# Altium PCB DUTBoard_Routed.PcbDoc (part 3 of 3)
Units mil, origin at the board's own origin, x right, y up, seen from the top; angles counter-clockwise.
Board outline 5475 x 5475 mil, 4 copper layers (Top Layer, Mid-Layer 1, Mid-Layer 2, Bottom Layer); 89 components, 471 nets, 1705 pads, 347 vias.
Unrouted connection lines stored in the file: 677.
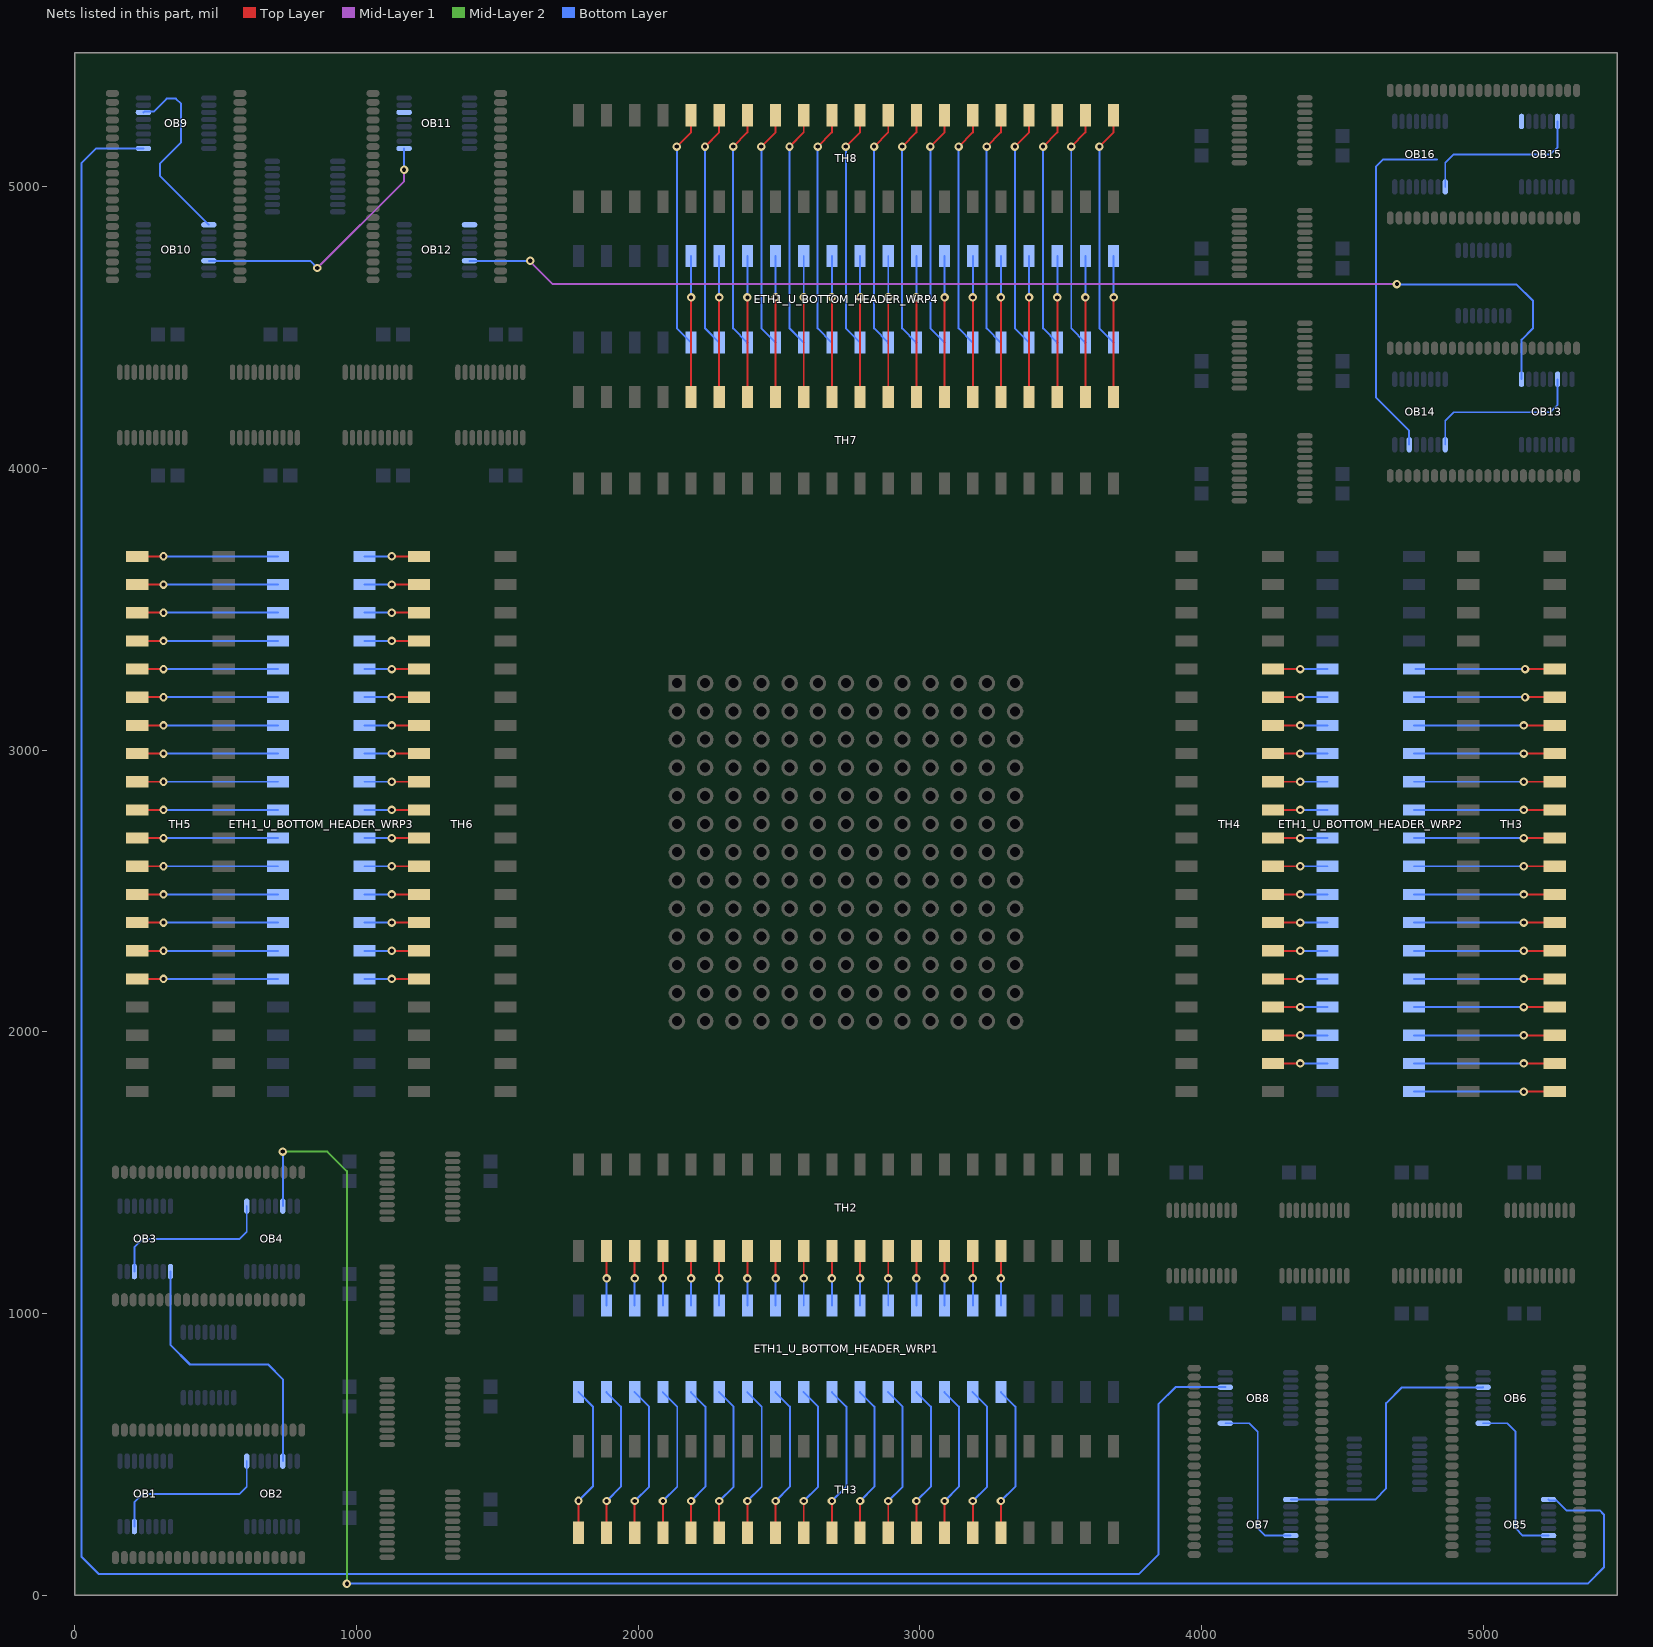
[diagram p5: the nets of this part, all layers, seen from the top]

## Via types
v1: diameter 30, hole 15, Top Layer to Bottom Layer, 347 vias

## Nets (pads, with @x,y where several pads share a name; then routed paths per layer and width w, separated by ;. In a path a pad name is that pad's centre, name@x,y a point inside that pad or via, vN(x,y) a via of type N, cw(c..) or ccw(c..) an arc to the next point about the centre after c; other vN are vias at no path point) (continued)
OUTSIDE_L_W0_U_BOTTOM_HEADER_WRP3: ETH1_U_BOTTOM_HEADER_WRP3.1 TH6.1 | length 193.6
  Top Layer w7: v1@1125,3688 v1(1125.5,3687.5) TH6.1@1221.46,3687.5
  Bottom Layer w7: ETH1_U_BOTTOM_HEADER_WRP3.1@1028.54,3687.5 v1(1125.5,3687.5)
OUTSIDE_L_W0_U_BOTTOM_HEADER_WRP4: ETH1_U_BOTTOM_HEADER_WRP4.1 TH8.1 | length 848.9
  Top Layer w7: v1(3637,5142) 3687.5,5192.5 TH8.1@3687.5,5253.54
  Bottom Layer w7: v1(3637,5142) 3637,4496.96 ETH1_U_BOTTOM_HEADER_WRP4.1@3687.5,4446.46
OUTSIDE_L_W1_U_BOTTOM_HEADER_WRP1: ETH1_U_BOTTOM_HEADER_WRP1.2 TH2.2 | length 192.9
  Top Layer w7: v1(1887.5,1124.5) TH2.2@1887.5,1221.46
  Bottom Layer w7: ETH1_U_BOTTOM_HEADER_WRP1.2@1887.5,1028.54 v1(1887.5,1124.5)
OUTSIDE_L_W1_U_BOTTOM_HEADER_WRP2: ETH1_U_BOTTOM_HEADER_WRP2.2 TH4.2 | length 192.9
  Top Layer w7: TH4.2@4253.54,1887.5 v1(4349.5,1887.5)
  Bottom Layer w7: v1(4349.5,1887.5) ETH1_U_BOTTOM_HEADER_WRP2.2@4446.46,1887.5
OUTSIDE_L_W1_U_BOTTOM_HEADER_WRP3: ETH1_U_BOTTOM_HEADER_WRP3.2 TH6.2 | length 192.9
  Top Layer w7: v1(1125.5,3587.5) TH6.2@1221.46,3587.5
  Bottom Layer w7: ETH1_U_BOTTOM_HEADER_WRP3.2@1028.54,3587.5 v1(1125.5,3587.5)
OUTSIDE_L_W1_U_BOTTOM_HEADER_WRP4: ETH1_U_BOTTOM_HEADER_WRP4.2 TH8.2 | length 848.9
  Top Layer w7: v1(3537,5142) 3587.5,5192.5 TH8.2@3587.5,5253.54
  Bottom Layer w7: v1(3537,5142) 3537,4496.96 ETH1_U_BOTTOM_HEADER_WRP4.2@3587.5,4446.46
OUTSIDE_L_W2_U_BOTTOM_HEADER_WRP1: ETH1_U_BOTTOM_HEADER_WRP1.3 TH2.3 | length 192.9
  Top Layer w7: v1(1987.5,1124.5) TH2.3@1987.5,1221.46
  Bottom Layer w7: ETH1_U_BOTTOM_HEADER_WRP1.3@1987.5,1028.54 v1(1987.5,1124.5)
OUTSIDE_L_W2_U_BOTTOM_HEADER_WRP2: ETH1_U_BOTTOM_HEADER_WRP2.3 TH4.3 | length 192.9
  Top Layer w7: TH4.3@4253.54,1987.5 v1(4349.5,1987.5)
  Bottom Layer w7: v1(4349.5,1987.5) ETH1_U_BOTTOM_HEADER_WRP2.3@4446.46,1987.5
OUTSIDE_L_W2_U_BOTTOM_HEADER_WRP3: ETH1_U_BOTTOM_HEADER_WRP3.3 TH6.3 | length 192.9
  Top Layer w7: v1(1125.5,3487.5) TH6.3@1221.46,3487.5
  Bottom Layer w7: ETH1_U_BOTTOM_HEADER_WRP3.3@1028.54,3487.5 v1(1125.5,3487.5)
OUTSIDE_L_W2_U_BOTTOM_HEADER_WRP4: ETH1_U_BOTTOM_HEADER_WRP4.3 TH8.3 | length 848.9
  Top Layer w7: v1(3437,5142) 3487.5,5192.5 TH8.3@3487.5,5253.54
  Bottom Layer w7: v1(3437,5142) 3437,4496.96 ETH1_U_BOTTOM_HEADER_WRP4.3@3487.5,4446.46
OUTSIDE_L_W3_U_BOTTOM_HEADER_WRP1: ETH1_U_BOTTOM_HEADER_WRP1.4 TH2.4 | length 192.9
  Top Layer w7: v1(2087.5,1124.5) TH2.4@2087.5,1221.46
  Bottom Layer w7: ETH1_U_BOTTOM_HEADER_WRP1.4@2087.5,1028.54 v1(2087.5,1124.5)
OUTSIDE_L_W3_U_BOTTOM_HEADER_WRP2: ETH1_U_BOTTOM_HEADER_WRP2.4 TH4.4 | length 192.9
  Top Layer w7: TH4.4@4253.54,2087.5 v1(4349.5,2087.5)
  Bottom Layer w7: v1(4349.5,2087.5) ETH1_U_BOTTOM_HEADER_WRP2.4@4446.46,2087.5
OUTSIDE_L_W3_U_BOTTOM_HEADER_WRP3: ETH1_U_BOTTOM_HEADER_WRP3.4 TH6.4 | length 192.9
  Top Layer w7: v1(1125.5,3387.5) TH6.4@1221.46,3387.5
  Bottom Layer w7: ETH1_U_BOTTOM_HEADER_WRP3.4@1028.54,3387.5 v1(1125.5,3387.5)
OUTSIDE_L_W3_U_BOTTOM_HEADER_WRP4: ETH1_U_BOTTOM_HEADER_WRP4.4 TH8.4 | length 848.9
  Top Layer w7: v1(3337,5142) 3387.5,5192.5 TH8.4@3387.5,5253.54
  Bottom Layer w7: v1(3337,5142) 3337,4496.96 ETH1_U_BOTTOM_HEADER_WRP4.4@3387.5,4446.46
OUTSIDE_L_W4_U_BOTTOM_HEADER_WRP1: ETH1_U_BOTTOM_HEADER_WRP1.5 TH2.5 | length 192.9
  Top Layer w7: v1(2187.5,1124.5) TH2.5@2187.5,1221.46
  Bottom Layer w7: ETH1_U_BOTTOM_HEADER_WRP1.5@2187.5,1028.54 v1(2187.5,1124.5)
OUTSIDE_L_W4_U_BOTTOM_HEADER_WRP2: ETH1_U_BOTTOM_HEADER_WRP2.5 TH4.5 | length 192.9
  Top Layer w7: TH4.5@4253.54,2187.5 v1(4349.5,2187.5)
  Bottom Layer w7: v1(4349.5,2187.5) ETH1_U_BOTTOM_HEADER_WRP2.5@4446.46,2187.5
OUTSIDE_L_W4_U_BOTTOM_HEADER_WRP3: ETH1_U_BOTTOM_HEADER_WRP3.5 TH6.5 | length 192.9
  Top Layer w7: v1(1125.5,3287.5) TH6.5@1221.46,3287.5
  Bottom Layer w7: ETH1_U_BOTTOM_HEADER_WRP3.5@1028.54,3287.5 v1(1125.5,3287.5)
OUTSIDE_L_W4_U_BOTTOM_HEADER_WRP4: ETH1_U_BOTTOM_HEADER_WRP4.5 TH8.5 | length 848.9
  Top Layer w7: v1(3237,5142) 3287.5,5192.5 TH8.5@3287.5,5253.54
  Bottom Layer w7: v1(3237,5142) 3237,4496.96 ETH1_U_BOTTOM_HEADER_WRP4.5@3287.5,4446.46
OUTSIDE_L_W5_U_BOTTOM_HEADER_WRP1: ETH1_U_BOTTOM_HEADER_WRP1.6 TH2.6 | length 192.9
  Top Layer w7: v1(2287.5,1124.5) TH2.6@2287.5,1221.46
  Bottom Layer w7: ETH1_U_BOTTOM_HEADER_WRP1.6@2287.5,1028.54 v1(2287.5,1124.5)
OUTSIDE_L_W5_U_BOTTOM_HEADER_WRP2: ETH1_U_BOTTOM_HEADER_WRP2.6 TH4.6 | length 192.9
  Top Layer w7: TH4.6@4253.54,2287.5 v1(4349.5,2287.5)
  Bottom Layer w7: v1(4349.5,2287.5) ETH1_U_BOTTOM_HEADER_WRP2.6@4446.46,2287.5
OUTSIDE_L_W5_U_BOTTOM_HEADER_WRP3: ETH1_U_BOTTOM_HEADER_WRP3.6 TH6.6 | length 192.9
  Top Layer w7: v1(1125.5,3187.5) TH6.6@1221.46,3187.5
  Bottom Layer w7: ETH1_U_BOTTOM_HEADER_WRP3.6@1028.54,3187.5 v1(1125.5,3187.5)
OUTSIDE_L_W5_U_BOTTOM_HEADER_WRP4: ETH1_U_BOTTOM_HEADER_WRP4.6 TH8.6 | length 848.9
  Top Layer w7: v1(3137,5142) 3187.5,5192.5 TH8.6@3187.5,5253.54
  Bottom Layer w7: v1(3137,5142) 3137,4496.96 ETH1_U_BOTTOM_HEADER_WRP4.6@3187.5,4446.46
OUTSIDE_L_W6_U_BOTTOM_HEADER_WRP1: ETH1_U_BOTTOM_HEADER_WRP1.7 TH2.7 | length 192.9
  Top Layer w7: v1(2387.5,1124.5) TH2.7@2387.5,1221.46
  Bottom Layer w7: ETH1_U_BOTTOM_HEADER_WRP1.7@2387.5,1028.54 v1(2387.5,1124.5)
OUTSIDE_L_W6_U_BOTTOM_HEADER_WRP2: ETH1_U_BOTTOM_HEADER_WRP2.7 TH4.7 | length 192.9
  Top Layer w7: TH4.7@4253.54,2387.5 v1(4349.5,2387.5)
  Bottom Layer w7: v1(4349.5,2387.5) ETH1_U_BOTTOM_HEADER_WRP2.7@4446.46,2387.5
OUTSIDE_L_W6_U_BOTTOM_HEADER_WRP3: ETH1_U_BOTTOM_HEADER_WRP3.7 TH6.7 | length 192.9
  Top Layer w7: v1(1125.5,3087.5) TH6.7@1221.46,3087.5
  Bottom Layer w7: ETH1_U_BOTTOM_HEADER_WRP3.7@1028.54,3087.5 v1(1125.5,3087.5)
OUTSIDE_L_W6_U_BOTTOM_HEADER_WRP4: ETH1_U_BOTTOM_HEADER_WRP4.7 TH8.7 | length 848.9
  Top Layer w7: v1(3037,5142) 3087.5,5192.5 TH8.7@3087.5,5253.54
  Bottom Layer w7: v1(3037,5142) 3037,4496.96 ETH1_U_BOTTOM_HEADER_WRP4.7@3087.5,4446.46
OUTSIDE_L_W7_U_BOTTOM_HEADER_WRP1: ETH1_U_BOTTOM_HEADER_WRP1.8 TH2.8 | length 192.9
  Top Layer w7: v1(2487.5,1124.5) TH2.8@2487.5,1221.46
  Bottom Layer w7: ETH1_U_BOTTOM_HEADER_WRP1.8@2487.5,1028.54 v1(2487.5,1124.5)
OUTSIDE_L_W7_U_BOTTOM_HEADER_WRP2: ETH1_U_BOTTOM_HEADER_WRP2.8 TH4.8 | length 192.9
  Top Layer w7: TH4.8@4253.54,2487.5 v1(4349.5,2487.5)
  Bottom Layer w7: v1(4349.5,2487.5) ETH1_U_BOTTOM_HEADER_WRP2.8@4446.46,2487.5
OUTSIDE_L_W7_U_BOTTOM_HEADER_WRP3: ETH1_U_BOTTOM_HEADER_WRP3.8 TH6.8 | length 192.9
  Top Layer w7: v1(1125.5,2987.5) TH6.8@1221.46,2987.5
  Bottom Layer w7: ETH1_U_BOTTOM_HEADER_WRP3.8@1028.54,2987.5 v1(1125.5,2987.5)
OUTSIDE_L_W7_U_BOTTOM_HEADER_WRP4: ETH1_U_BOTTOM_HEADER_WRP4.8 TH8.8 | length 848.9
  Top Layer w7: v1(2937,5142) 2987.5,5192.5 TH8.8@2987.5,5253.54
  Bottom Layer w7: v1(2937,5142) 2937,4496.96 ETH1_U_BOTTOM_HEADER_WRP4.8@2987.5,4446.46
OUTSIDE_L_W8_U_BOTTOM_HEADER_WRP1: ETH1_U_BOTTOM_HEADER_WRP1.9 TH2.9 | length 192.9
  Top Layer w7: v1(2587.5,1124.5) TH2.9@2587.5,1221.46
  Bottom Layer w7: ETH1_U_BOTTOM_HEADER_WRP1.9@2587.5,1028.54 v1(2587.5,1124.5)
OUTSIDE_L_W8_U_BOTTOM_HEADER_WRP2: ETH1_U_BOTTOM_HEADER_WRP2.9 TH4.9 | length 192.9
  Top Layer w7: TH4.9@4253.54,2587.5 v1(4349.5,2587.5)
  Bottom Layer w7: v1(4349.5,2587.5) ETH1_U_BOTTOM_HEADER_WRP2.9@4446.46,2587.5
OUTSIDE_L_W8_U_BOTTOM_HEADER_WRP3: ETH1_U_BOTTOM_HEADER_WRP3.9 TH6.9 | length 192.9
  Top Layer w7: v1(1125.5,2887.5) TH6.9@1221.46,2887.5
  Bottom Layer w7: ETH1_U_BOTTOM_HEADER_WRP3.9@1028.54,2887.5 v1(1125.5,2887.5)
OUTSIDE_L_W8_U_BOTTOM_HEADER_WRP4: ETH1_U_BOTTOM_HEADER_WRP4.9 TH8.9 | length 848.9
  Top Layer w7: v1(2837,5142) 2887.5,5192.5 TH8.9@2887.5,5253.54
  Bottom Layer w7: v1(2837,5142) 2837,4496.96 ETH1_U_BOTTOM_HEADER_WRP4.9@2887.5,4446.46
OUTSIDE_L_W9_U_BOTTOM_HEADER_WRP1: ETH1_U_BOTTOM_HEADER_WRP1.10 TH2.10 | length 192.9
  Top Layer w7: v1(2687.5,1124.5) TH2.10@2687.5,1221.46
  Bottom Layer w7: ETH1_U_BOTTOM_HEADER_WRP1.10@2687.5,1028.54 v1(2687.5,1124.5)
OUTSIDE_L_W9_U_BOTTOM_HEADER_WRP2: ETH1_U_BOTTOM_HEADER_WRP2.10 TH4.10 | length 192.9
  Top Layer w7: TH4.10@4253.54,2687.5 v1(4349.5,2687.5)
  Bottom Layer w7: v1(4349.5,2687.5) ETH1_U_BOTTOM_HEADER_WRP2.10@4446.46,2687.5
OUTSIDE_L_W9_U_BOTTOM_HEADER_WRP3: ETH1_U_BOTTOM_HEADER_WRP3.10 TH6.10 | length 192.9
  Top Layer w7: v1(1125.5,2787.5) TH6.10@1221.46,2787.5
  Bottom Layer w7: ETH1_U_BOTTOM_HEADER_WRP3.10@1028.54,2787.5 v1(1125.5,2787.5)
OUTSIDE_L_W9_U_BOTTOM_HEADER_WRP4: ETH1_U_BOTTOM_HEADER_WRP4.10 TH8.10 | length 848.9
  Top Layer w7: v1(2737,5142) 2787.5,5192.5 TH8.10@2787.5,5253.54
  Bottom Layer w7: v1(2737,5142) 2737,4496.96 ETH1_U_BOTTOM_HEADER_WRP4.10@2787.5,4446.46
OUTSIDE_L_W10_U_BOTTOM_HEADER_WRP1: ETH1_U_BOTTOM_HEADER_WRP1.11 TH2.11 | length 192.9
  Top Layer w7: v1(2787.5,1124.5) TH2.11@2787.5,1221.46
  Bottom Layer w7: ETH1_U_BOTTOM_HEADER_WRP1.11@2787.5,1028.54 v1(2787.5,1124.5)
OUTSIDE_L_W10_U_BOTTOM_HEADER_WRP2: ETH1_U_BOTTOM_HEADER_WRP2.11 TH4.11 | length 192.9
  Top Layer w7: TH4.11@4253.54,2787.5 v1(4349.5,2787.5)
  Bottom Layer w7: v1(4349.5,2787.5) ETH1_U_BOTTOM_HEADER_WRP2.11@4446.46,2787.5
OUTSIDE_L_W10_U_BOTTOM_HEADER_WRP3: ETH1_U_BOTTOM_HEADER_WRP3.11 TH6.11 | length 192.9
  Top Layer w7: v1(1125.5,2687.5) TH6.11@1221.46,2687.5
  Bottom Layer w7: ETH1_U_BOTTOM_HEADER_WRP3.11@1028.54,2687.5 v1(1125.5,2687.5)
OUTSIDE_L_W10_U_BOTTOM_HEADER_WRP4: ETH1_U_BOTTOM_HEADER_WRP4.11 TH8.11 | length 848.9
  Top Layer w7: v1(2637,5142) 2687.5,5192.5 TH8.11@2687.5,5253.54
  Bottom Layer w7: v1(2637,5142) 2637,4496.96 ETH1_U_BOTTOM_HEADER_WRP4.11@2687.5,4446.46
OUTSIDE_L_W11_U_BOTTOM_HEADER_WRP1: ETH1_U_BOTTOM_HEADER_WRP1.12 TH2.12 | length 192.9
  Top Layer w7: v1(2887.5,1124.5) TH2.12@2887.5,1221.46
  Bottom Layer w7: ETH1_U_BOTTOM_HEADER_WRP1.12@2887.5,1028.54 v1(2887.5,1124.5)
OUTSIDE_L_W11_U_BOTTOM_HEADER_WRP2: ETH1_U_BOTTOM_HEADER_WRP2.12 TH4.12 | length 192.9
  Top Layer w7: TH4.12@4253.54,2887.5 v1(4349.5,2887.5)
  Bottom Layer w7: v1(4349.5,2887.5) ETH1_U_BOTTOM_HEADER_WRP2.12@4446.46,2887.5
OUTSIDE_L_W11_U_BOTTOM_HEADER_WRP3: ETH1_U_BOTTOM_HEADER_WRP3.12 TH6.12 | length 192.9
  Top Layer w7: v1(1125.5,2587.5) TH6.12@1221.46,2587.5
  Bottom Layer w7: ETH1_U_BOTTOM_HEADER_WRP3.12@1028.54,2587.5 v1(1125.5,2587.5)
OUTSIDE_L_W11_U_BOTTOM_HEADER_WRP4: ETH1_U_BOTTOM_HEADER_WRP4.12 TH8.12 | length 848.9
  Top Layer w7: v1(2537,5142) 2587.5,5192.5 TH8.12@2587.5,5253.54
  Bottom Layer w7: v1(2537,5142) 2537,4496.96 ETH1_U_BOTTOM_HEADER_WRP4.12@2587.5,4446.46
OUTSIDE_L_W12_U_BOTTOM_HEADER_WRP1: ETH1_U_BOTTOM_HEADER_WRP1.13 TH2.13 | length 192.9
  Top Layer w7: v1(2987.5,1124.5) TH2.13@2987.5,1221.46
  Bottom Layer w7: ETH1_U_BOTTOM_HEADER_WRP1.13@2987.5,1028.54 v1(2987.5,1124.5)
OUTSIDE_L_W12_U_BOTTOM_HEADER_WRP2: ETH1_U_BOTTOM_HEADER_WRP2.13 TH4.13 | length 192.9
  Top Layer w7: TH4.13@4253.54,2987.5 v1(4349.5,2987.5)
  Bottom Layer w7: v1(4349.5,2987.5) ETH1_U_BOTTOM_HEADER_WRP2.13@4446.46,2987.5
OUTSIDE_L_W12_U_BOTTOM_HEADER_WRP3: ETH1_U_BOTTOM_HEADER_WRP3.13 TH6.13 | length 192.9
  Top Layer w7: v1(1125.5,2487.5) TH6.13@1221.46,2487.5
  Bottom Layer w7: ETH1_U_BOTTOM_HEADER_WRP3.13@1028.54,2487.5 v1(1125.5,2487.5)
OUTSIDE_L_W12_U_BOTTOM_HEADER_WRP4: ETH1_U_BOTTOM_HEADER_WRP4.13 TH8.13 | length 848.9
  Top Layer w7: v1(2437,5142) 2487.5,5192.5 TH8.13@2487.5,5253.54
  Bottom Layer w7: v1(2437,5142) 2437,4496.96 ETH1_U_BOTTOM_HEADER_WRP4.13@2487.5,4446.46
OUTSIDE_L_W13_U_BOTTOM_HEADER_WRP1: ETH1_U_BOTTOM_HEADER_WRP1.14 TH2.14 | length 192.9
  Top Layer w7: v1(3087.5,1124.5) TH2.14@3087.5,1221.46
  Bottom Layer w7: ETH1_U_BOTTOM_HEADER_WRP1.14@3087.5,1028.54 v1(3087.5,1124.5)
OUTSIDE_L_W13_U_BOTTOM_HEADER_WRP2: ETH1_U_BOTTOM_HEADER_WRP2.14 TH4.14 | length 192.9
  Top Layer w7: TH4.14@4253.54,3087.5 v1(4349.5,3087.5)
  Bottom Layer w7: v1(4349.5,3087.5) ETH1_U_BOTTOM_HEADER_WRP2.14@4446.46,3087.5
OUTSIDE_L_W13_U_BOTTOM_HEADER_WRP3: ETH1_U_BOTTOM_HEADER_WRP3.14 TH6.14 | length 192.9
  Top Layer w7: v1(1125.5,2387.5) TH6.14@1221.46,2387.5
  Bottom Layer w7: ETH1_U_BOTTOM_HEADER_WRP3.14@1028.54,2387.5 v1(1125.5,2387.5)
OUTSIDE_L_W13_U_BOTTOM_HEADER_WRP4: ETH1_U_BOTTOM_HEADER_WRP4.14 TH8.14 | length 848.9
  Top Layer w7: v1(2337,5142) 2387.5,5192.5 TH8.14@2387.5,5253.54
  Bottom Layer w7: v1(2337,5142) 2337,4496.96 ETH1_U_BOTTOM_HEADER_WRP4.14@2387.5,4446.46
OUTSIDE_L_W14_U_BOTTOM_HEADER_WRP1: ETH1_U_BOTTOM_HEADER_WRP1.15 TH2.15 | length 192.9
  Top Layer w7: v1(3187.5,1124.5) TH2.15@3187.5,1221.46
  Bottom Layer w7: ETH1_U_BOTTOM_HEADER_WRP1.15@3187.5,1028.54 v1(3187.5,1124.5)
OUTSIDE_L_W14_U_BOTTOM_HEADER_WRP2: ETH1_U_BOTTOM_HEADER_WRP2.15 TH4.15 | length 192.9
  Top Layer w7: TH4.15@4253.54,3187.5 v1(4349.5,3187.5)
  Bottom Layer w7: v1(4349.5,3187.5) ETH1_U_BOTTOM_HEADER_WRP2.15@4446.46,3187.5
OUTSIDE_L_W14_U_BOTTOM_HEADER_WRP3: ETH1_U_BOTTOM_HEADER_WRP3.15 TH6.15 | length 192.9
  Top Layer w7: v1(1125.5,2287.5) TH6.15@1221.46,2287.5
  Bottom Layer w7: ETH1_U_BOTTOM_HEADER_WRP3.15@1028.54,2287.5 v1(1125.5,2287.5)
OUTSIDE_L_W14_U_BOTTOM_HEADER_WRP4: ETH1_U_BOTTOM_HEADER_WRP4.15 TH8.15 | length 848.9
  Top Layer w7: v1(2237,5142) 2287.5,5192.5 TH8.15@2287.5,5253.54
  Bottom Layer w7: v1(2237,5142) 2237,4496.96 ETH1_U_BOTTOM_HEADER_WRP4.15@2287.5,4446.46
OUTSIDE_L_W15_U_BOTTOM_HEADER_WRP1: ETH1_U_BOTTOM_HEADER_WRP1.16 TH2.16 | length 192.9
  Top Layer w7: v1(3287.5,1124.5) TH2.16@3287.5,1221.46
  Bottom Layer w7: ETH1_U_BOTTOM_HEADER_WRP1.16@3287.5,1028.54 v1(3287.5,1124.5)
OUTSIDE_L_W15_U_BOTTOM_HEADER_WRP2: ETH1_U_BOTTOM_HEADER_WRP2.16 TH4.16 | length 192.9
  Top Layer w7: TH4.16@4253.54,3287.5 v1(4349.5,3287.5)
  Bottom Layer w7: v1(4349.5,3287.5) ETH1_U_BOTTOM_HEADER_WRP2.16@4446.46,3287.5
OUTSIDE_L_W15_U_BOTTOM_HEADER_WRP3: ETH1_U_BOTTOM_HEADER_WRP3.16 TH6.16 | length 192.9
  Top Layer w7: v1(1125.5,2187.5) TH6.16@1221.46,2187.5
  Bottom Layer w7: ETH1_U_BOTTOM_HEADER_WRP3.16@1028.54,2187.5 v1(1125.5,2187.5)
OUTSIDE_L_W15_U_BOTTOM_HEADER_WRP4: ETH1_U_BOTTOM_HEADER_WRP4.16 TH8.16 | length 848.9
  Top Layer w7: v1(2137,5142) 2187.5,5192.5 TH8.16@2187.5,5253.54
  Bottom Layer w7: v1(2137,5142) 2137,4496.96 ETH1_U_BOTTOM_HEADER_WRP4.16@2187.5,4446.46
OUTSIDE_R_W0_U_BOTTOM_HEADER_WRP1: ETH1_U_BOTTOM_HEADER_WRP1.40 TH3.1@1787.5,221.46 | length 542.7
  Top Layer w7: TH3.1@1787.5,221.46 1788,221.96 v1(1788,335)
  Bottom Layer w7: ETH1_U_BOTTOM_HEADER_WRP1.40@1787.5,721.46 1839,669.96 1839,386 v1(1788,335)
OUTSIDE_R_W0_U_BOTTOM_HEADER_WRP2: ETH1_U_BOTTOM_HEADER_WRP2.40 TH3.1@5253.54,1787.5 | length 503.5
  Top Layer w7: v1(5143.5,1787.5) TH3.1@5253.54,1787.5
  Bottom Layer w7: ETH1_U_BOTTOM_HEADER_WRP2.40@4753.54,1787.5 v1(5143.5,1787.5) v1@5146,1785
OUTSIDE_R_W0_U_BOTTOM_HEADER_WRP3: ETH1_U_BOTTOM_HEADER_WRP3.40 TH5.1 | length 500
  Top Layer w7: TH5.1@221.46,3687.5 v1(315,3687.5)
  Bottom Layer w7: v1(315,3687.5) ETH1_U_BOTTOM_HEADER_WRP3.40@721.46,3687.5
OUTSIDE_R_W0_U_BOTTOM_HEADER_WRP4: ETH1_U_BOTTOM_HEADER_WRP4.40 TH7.1 | length 500
  Top Layer w7: TH7.1@3687.5,4253.54 v1(3687.5,4606.5)
  Bottom Layer w7: v1(3687.5,4606.5) ETH1_U_BOTTOM_HEADER_WRP4.40@3687.5,4753.54
OUTSIDE_R_W1_U_BOTTOM_HEADER_WRP1: ETH1_U_BOTTOM_HEADER_WRP1.39 TH3.2@1887.5,221.46 | length 1052.5
  Top Layer w7: TH3.2@1887,220.96 TH3.2@1887.5,221.46 v1(1887.5,334.5)
  Bottom Layer w7: v1(1887.5,334.5) 1938.5,385.5 1938.5,669.46 ; ETH1_U_BOTTOM_HEADER_WRP1.39@1887,720.96 1938.5,669.46 ; ETH1_U_BOTTOM_HEADER_WRP1.39@1887,720.96 1938.5,669.46 ; ETH1_U_BOTTOM_HEADER_WRP1.39@1887,720.96 1938.5,669.46 ; ETH1_U_BOTTOM_HEADER_WRP1.39@1887,720.96 1938.5,669.46 ; ETH1_U_BOTTOM_HEADER_WRP1.39@1887,720.96 1938.5,669.46 ; ETH1_U_BOTTOM_HEADER_WRP1.39@1887,720.96 1938.5,669.46 ; ETH1_U_BOTTOM_HEADER_WRP1.39@1887,720.96 1938.5,669.46 ; ETH1_U_BOTTOM_HEADER_WRP1.39@1887,720.96 1938.5,669.46
OUTSIDE_R_W1_U_BOTTOM_HEADER_WRP2: ETH1_U_BOTTOM_HEADER_WRP2.39 TH3.2@5253.54,1887.5 | length 503.5
  Top Layer w7: v1(5143.5,1887.5) TH3.2@5253.54,1887.5
  Bottom Layer w7: ETH1_U_BOTTOM_HEADER_WRP2.39@4753.54,1887.5 v1(5143.5,1887.5) v1@5146,1885
OUTSIDE_R_W1_U_BOTTOM_HEADER_WRP3: ETH1_U_BOTTOM_HEADER_WRP3.39 TH5.2 | length 500
  Top Layer w7: TH5.2@221.46,3587.5 v1(315,3587.5)
  Bottom Layer w7: v1(315,3587.5) ETH1_U_BOTTOM_HEADER_WRP3.39@721.46,3587.5
OUTSIDE_R_W1_U_BOTTOM_HEADER_WRP4: ETH1_U_BOTTOM_HEADER_WRP4.39 TH7.2 | length 500
  Top Layer w7: TH7.2@3587.5,4253.54 v1(3587.5,4606.5)
  Bottom Layer w7: v1(3587.5,4606.5) ETH1_U_BOTTOM_HEADER_WRP4.39@3587.5,4753.54
OUTSIDE_R_W2_U_BOTTOM_HEADER_WRP1: ETH1_U_BOTTOM_HEADER_WRP1.38 TH3.3@1987.5,221.46 | length 1052.5
  Top Layer w7: TH3.3@1987,220.96 TH3.3@1987.5,221.46 v1(1987.5,334.5)
  Bottom Layer w7: v1(1987.5,334.5) 2038.5,385.5 2038.5,669.46 ; ETH1_U_BOTTOM_HEADER_WRP1.38@1987,720.96 2038.5,669.46 ; ETH1_U_BOTTOM_HEADER_WRP1.38@1987,720.96 2038.5,669.46 ; ETH1_U_BOTTOM_HEADER_WRP1.38@1987,720.96 2038.5,669.46 ; ETH1_U_BOTTOM_HEADER_WRP1.38@1987,720.96 2038.5,669.46 ; ETH1_U_BOTTOM_HEADER_WRP1.38@1987,720.96 2038.5,669.46 ; ETH1_U_BOTTOM_HEADER_WRP1.38@1987,720.96 2038.5,669.46 ; ETH1_U_BOTTOM_HEADER_WRP1.38@1987,720.96 2038.5,669.46 ; ETH1_U_BOTTOM_HEADER_WRP1.38@1987,720.96 2038.5,669.46
OUTSIDE_R_W2_U_BOTTOM_HEADER_WRP2: ETH1_U_BOTTOM_HEADER_WRP2.38 TH3.3@5253.54,1987.5 | length 503.5
  Top Layer w7: v1(5143.5,1987.5) TH3.3@5253.54,1987.5
  Bottom Layer w7: ETH1_U_BOTTOM_HEADER_WRP2.38@4753.54,1987.5 v1(5143.5,1987.5) v1@5146,1985
OUTSIDE_R_W2_U_BOTTOM_HEADER_WRP3: ETH1_U_BOTTOM_HEADER_WRP3.38 TH5.3 | length 500
  Top Layer w7: TH5.3@221.46,3487.5 v1(315,3487.5)
  Bottom Layer w7: v1(315,3487.5) ETH1_U_BOTTOM_HEADER_WRP3.38@721.46,3487.5
OUTSIDE_R_W2_U_BOTTOM_HEADER_WRP4: ETH1_U_BOTTOM_HEADER_WRP4.38 TH7.3 | length 500
  Top Layer w7: TH7.3@3487.5,4253.54 v1(3487.5,4606.5)
  Bottom Layer w7: v1(3487.5,4606.5) ETH1_U_BOTTOM_HEADER_WRP4.38@3487.5,4753.54
OUTSIDE_R_W3_U_BOTTOM_HEADER_WRP1: ETH1_U_BOTTOM_HEADER_WRP1.37 TH3.4@2087.5,221.46 | length 1052.5
  Top Layer w7: TH3.4@2087,220.96 TH3.4@2087.5,221.46 v1(2087.5,334.5)
  Bottom Layer w7: v1(2087.5,334.5) 2138.5,385.5 2138.5,669.46 ; ETH1_U_BOTTOM_HEADER_WRP1.37@2087,720.96 2138.5,669.46 ; ETH1_U_BOTTOM_HEADER_WRP1.37@2087,720.96 2138.5,669.46 ; ETH1_U_BOTTOM_HEADER_WRP1.37@2087,720.96 2138.5,669.46 ; ETH1_U_BOTTOM_HEADER_WRP1.37@2087,720.96 2138.5,669.46 ; ETH1_U_BOTTOM_HEADER_WRP1.37@2087,720.96 2138.5,669.46 ; ETH1_U_BOTTOM_HEADER_WRP1.37@2087,720.96 2138.5,669.46 ; ETH1_U_BOTTOM_HEADER_WRP1.37@2087,720.96 2138.5,669.46 ; ETH1_U_BOTTOM_HEADER_WRP1.37@2087,720.96 2138.5,669.46
OUTSIDE_R_W3_U_BOTTOM_HEADER_WRP2: ETH1_U_BOTTOM_HEADER_WRP2.37 TH3.4@5253.54,2087.5 | length 503.5
  Top Layer w7: v1(5143.5,2087.5) TH3.4@5253.54,2087.5
  Bottom Layer w7: ETH1_U_BOTTOM_HEADER_WRP2.37@4753.54,2087.5 v1(5143.5,2087.5) v1@5146,2085
OUTSIDE_R_W3_U_BOTTOM_HEADER_WRP3: ETH1_U_BOTTOM_HEADER_WRP3.37 TH5.4 | length 500
  Top Layer w7: TH5.4@221.46,3387.5 v1(315,3387.5)
  Bottom Layer w7: v1(315,3387.5) ETH1_U_BOTTOM_HEADER_WRP3.37@721.46,3387.5
OUTSIDE_R_W3_U_BOTTOM_HEADER_WRP4: ETH1_U_BOTTOM_HEADER_WRP4.37 TH7.4 | length 500
  Top Layer w7: TH7.4@3387.5,4253.54 v1(3387.5,4606.5)
  Bottom Layer w7: v1(3387.5,4606.5) ETH1_U_BOTTOM_HEADER_WRP4.37@3387.5,4753.54
OUTSIDE_R_W4_U_BOTTOM_HEADER_WRP1: ETH1_U_BOTTOM_HEADER_WRP1.36 TH3.5@2187.5,221.46 | length 1052.5
  Top Layer w7: TH3.5@2187,220.96 TH3.5@2187.5,221.46 v1(2187.5,334.5)
  Bottom Layer w7: v1(2187.5,334.5) 2238.5,385.5 2238.5,669.46 ; ETH1_U_BOTTOM_HEADER_WRP1.36@2187,720.96 2238.5,669.46 ; ETH1_U_BOTTOM_HEADER_WRP1.36@2187,720.96 2238.5,669.46 ; ETH1_U_BOTTOM_HEADER_WRP1.36@2187,720.96 2238.5,669.46 ; ETH1_U_BOTTOM_HEADER_WRP1.36@2187,720.96 2238.5,669.46 ; ETH1_U_BOTTOM_HEADER_WRP1.36@2187,720.96 2238.5,669.46 ; ETH1_U_BOTTOM_HEADER_WRP1.36@2187,720.96 2238.5,669.46 ; ETH1_U_BOTTOM_HEADER_WRP1.36@2187,720.96 2238.5,669.46 ; ETH1_U_BOTTOM_HEADER_WRP1.36@2187,720.96 2238.5,669.46
OUTSIDE_R_W4_U_BOTTOM_HEADER_WRP2: ETH1_U_BOTTOM_HEADER_WRP2.36 TH3.5@5253.54,2187.5 | length 503.5
  Top Layer w7: v1(5143.5,2187.5) TH3.5@5253.54,2187.5
  Bottom Layer w7: ETH1_U_BOTTOM_HEADER_WRP2.36@4753.54,2187.5 v1(5143.5,2187.5) v1@5146,2185
OUTSIDE_R_W4_U_BOTTOM_HEADER_WRP3: ETH1_U_BOTTOM_HEADER_WRP3.36 TH5.5 | length 500
  Top Layer w7: TH5.5@221.46,3287.5 v1(315,3287.5)
  Bottom Layer w7: v1(315,3287.5) ETH1_U_BOTTOM_HEADER_WRP3.36@721.46,3287.5
OUTSIDE_R_W4_U_BOTTOM_HEADER_WRP4: ETH1_U_BOTTOM_HEADER_WRP4.36 TH7.5 | length 500
  Top Layer w7: TH7.5@3287.5,4253.54 v1(3287.5,4606.5)
  Bottom Layer w7: v1(3287.5,4606.5) ETH1_U_BOTTOM_HEADER_WRP4.36@3287.5,4753.54
OUTSIDE_R_W5_U_BOTTOM_HEADER_WRP1: ETH1_U_BOTTOM_HEADER_WRP1.35 TH3.6@2287.5,221.46 | length 1052.5
  Top Layer w7: TH3.6@2287,220.96 TH3.6@2287.5,221.46 v1(2287.5,334.5)
  Bottom Layer w7: v1(2287.5,334.5) 2338.5,385.5 2338.5,669.46 ; ETH1_U_BOTTOM_HEADER_WRP1.35@2287,720.96 2338.5,669.46 ; ETH1_U_BOTTOM_HEADER_WRP1.35@2287,720.96 2338.5,669.46 ; ETH1_U_BOTTOM_HEADER_WRP1.35@2287,720.96 2338.5,669.46 ; ETH1_U_BOTTOM_HEADER_WRP1.35@2287,720.96 2338.5,669.46 ; ETH1_U_BOTTOM_HEADER_WRP1.35@2287,720.96 2338.5,669.46 ; ETH1_U_BOTTOM_HEADER_WRP1.35@2287,720.96 2338.5,669.46 ; ETH1_U_BOTTOM_HEADER_WRP1.35@2287,720.96 2338.5,669.46 ; ETH1_U_BOTTOM_HEADER_WRP1.35@2287,720.96 2338.5,669.46
OUTSIDE_R_W5_U_BOTTOM_HEADER_WRP2: ETH1_U_BOTTOM_HEADER_WRP2.35 TH3.6@5253.54,2287.5 | length 503.5
  Top Layer w7: v1(5143.5,2287.5) TH3.6@5253.54,2287.5
  Bottom Layer w7: ETH1_U_BOTTOM_HEADER_WRP2.35@4753.54,2287.5 v1(5143.5,2287.5) v1@5146,2285
OUTSIDE_R_W5_U_BOTTOM_HEADER_WRP3: ETH1_U_BOTTOM_HEADER_WRP3.35 TH5.6 | length 500
  Top Layer w7: TH5.6@221.46,3187.5 v1(315,3187.5)
  Bottom Layer w7: v1(315,3187.5) ETH1_U_BOTTOM_HEADER_WRP3.35@721.46,3187.5
OUTSIDE_R_W5_U_BOTTOM_HEADER_WRP4: ETH1_U_BOTTOM_HEADER_WRP4.35 TH7.6 | length 500
  Top Layer w7: TH7.6@3187.5,4253.54 v1(3187.5,4606.5)
  Bottom Layer w7: v1(3187.5,4606.5) ETH1_U_BOTTOM_HEADER_WRP4.35@3187.5,4753.54
OUTSIDE_R_W6_U_BOTTOM_HEADER_WRP1: ETH1_U_BOTTOM_HEADER_WRP1.34 TH3.7@2387.5,221.46 | length 1052.5
  Top Layer w7: TH3.7@2387,220.96 TH3.7@2387.5,221.46 v1(2387.5,334.5)
  Bottom Layer w7: v1(2387.5,334.5) 2438.5,385.5 2438.5,669.46 ; ETH1_U_BOTTOM_HEADER_WRP1.34@2387,720.96 2438.5,669.46 ; ETH1_U_BOTTOM_HEADER_WRP1.34@2387,720.96 2438.5,669.46 ; ETH1_U_BOTTOM_HEADER_WRP1.34@2387,720.96 2438.5,669.46 ; ETH1_U_BOTTOM_HEADER_WRP1.34@2387,720.96 2438.5,669.46 ; ETH1_U_BOTTOM_HEADER_WRP1.34@2387,720.96 2438.5,669.46 ; ETH1_U_BOTTOM_HEADER_WRP1.34@2387,720.96 2438.5,669.46 ; ETH1_U_BOTTOM_HEADER_WRP1.34@2387,720.96 2438.5,669.46 ; ETH1_U_BOTTOM_HEADER_WRP1.34@2387,720.96 2438.5,669.46
OUTSIDE_R_W6_U_BOTTOM_HEADER_WRP2: ETH1_U_BOTTOM_HEADER_WRP2.34 TH3.7@5253.54,2387.5 | length 503.5
  Top Layer w7: v1(5143.5,2387.5) TH3.7@5253.54,2387.5
  Bottom Layer w7: ETH1_U_BOTTOM_HEADER_WRP2.34@4753.54,2387.5 v1(5143.5,2387.5) v1@5146,2385
OUTSIDE_R_W6_U_BOTTOM_HEADER_WRP3: ETH1_U_BOTTOM_HEADER_WRP3.34 TH5.7 | length 500
  Top Layer w7: TH5.7@221.46,3087.5 v1(315,3087.5)
  Bottom Layer w7: v1(315,3087.5) ETH1_U_BOTTOM_HEADER_WRP3.34@721.46,3087.5
OUTSIDE_R_W6_U_BOTTOM_HEADER_WRP4: ETH1_U_BOTTOM_HEADER_WRP4.34 TH7.7 | length 500
  Top Layer w7: TH7.7@3087.5,4253.54 v1(3087.5,4606.5)
  Bottom Layer w7: v1(3087.5,4606.5) ETH1_U_BOTTOM_HEADER_WRP4.34@3087.5,4753.54
OUTSIDE_R_W7_U_BOTTOM_HEADER_WRP1: ETH1_U_BOTTOM_HEADER_WRP1.33 TH3.8@2487.5,221.46 | length 1052.5
  Top Layer w7: TH3.8@2487,220.96 TH3.8@2487.5,221.46 v1(2487.5,334.5)
  Bottom Layer w7: v1(2487.5,334.5) 2538.5,385.5 2538.5,669.46 ; ETH1_U_BOTTOM_HEADER_WRP1.33@2487,720.96 2538.5,669.46 ; ETH1_U_BOTTOM_HEADER_WRP1.33@2487,720.96 2538.5,669.46 ; ETH1_U_BOTTOM_HEADER_WRP1.33@2487,720.96 2538.5,669.46 ; ETH1_U_BOTTOM_HEADER_WRP1.33@2487,720.96 2538.5,669.46 ; ETH1_U_BOTTOM_HEADER_WRP1.33@2487,720.96 2538.5,669.46 ; ETH1_U_BOTTOM_HEADER_WRP1.33@2487,720.96 2538.5,669.46 ; ETH1_U_BOTTOM_HEADER_WRP1.33@2487,720.96 2538.5,669.46 ; ETH1_U_BOTTOM_HEADER_WRP1.33@2487,720.96 2538.5,669.46
OUTSIDE_R_W7_U_BOTTOM_HEADER_WRP2: ETH1_U_BOTTOM_HEADER_WRP2.33 TH3.8@5253.54,2487.5 | length 503.5
  Top Layer w7: v1(5143.5,2487.5) TH3.8@5253.54,2487.5
  Bottom Layer w7: ETH1_U_BOTTOM_HEADER_WRP2.33@4753.54,2487.5 v1(5143.5,2487.5) v1@5146,2485
OUTSIDE_R_W7_U_BOTTOM_HEADER_WRP3: ETH1_U_BOTTOM_HEADER_WRP3.33 TH5.8 | length 500
  Top Layer w7: TH5.8@221.46,2987.5 v1(315,2987.5)
  Bottom Layer w7: v1(315,2987.5) ETH1_U_BOTTOM_HEADER_WRP3.33@721.46,2987.5
OUTSIDE_R_W7_U_BOTTOM_HEADER_WRP4: ETH1_U_BOTTOM_HEADER_WRP4.33 TH7.8 | length 500
  Top Layer w7: TH7.8@2987.5,4253.54 v1(2987.5,4606.5)
  Bottom Layer w7: v1(2987.5,4606.5) ETH1_U_BOTTOM_HEADER_WRP4.33@2987.5,4753.54
OUTSIDE_R_W8_U_BOTTOM_HEADER_WRP1: ETH1_U_BOTTOM_HEADER_WRP1.32 TH3.9@2587.5,221.46 | length 1052.5
  Top Layer w7: TH3.9@2587,220.96 TH3.9@2587.5,221.46 v1(2587.5,334.5)
  Bottom Layer w7: v1(2587.5,334.5) 2638.5,385.5 2638.5,669.46 ; ETH1_U_BOTTOM_HEADER_WRP1.32@2587,720.96 2638.5,669.46 ; ETH1_U_BOTTOM_HEADER_WRP1.32@2587,720.96 2638.5,669.46 ; ETH1_U_BOTTOM_HEADER_WRP1.32@2587,720.96 2638.5,669.46 ; ETH1_U_BOTTOM_HEADER_WRP1.32@2587,720.96 2638.5,669.46 ; ETH1_U_BOTTOM_HEADER_WRP1.32@2587,720.96 2638.5,669.46 ; ETH1_U_BOTTOM_HEADER_WRP1.32@2587,720.96 2638.5,669.46 ; ETH1_U_BOTTOM_HEADER_WRP1.32@2587,720.96 2638.5,669.46 ; ETH1_U_BOTTOM_HEADER_WRP1.32@2587,720.96 2638.5,669.46
OUTSIDE_R_W8_U_BOTTOM_HEADER_WRP2: ETH1_U_BOTTOM_HEADER_WRP2.32 TH3.9@5253.54,2587.5 | length 503.5
  Top Layer w7: v1(5143.5,2587.5) TH3.9@5253.54,2587.5
  Bottom Layer w7: ETH1_U_BOTTOM_HEADER_WRP2.32@4753.54,2587.5 v1(5143.5,2587.5) v1@5146,2585
OUTSIDE_R_W8_U_BOTTOM_HEADER_WRP3: ETH1_U_BOTTOM_HEADER_WRP3.32 TH5.9 | length 500
  Top Layer w7: TH5.9@221.46,2887.5 v1(315,2887.5)
  Bottom Layer w7: v1(315,2887.5) ETH1_U_BOTTOM_HEADER_WRP3.32@721.46,2887.5
OUTSIDE_R_W8_U_BOTTOM_HEADER_WRP4: ETH1_U_BOTTOM_HEADER_WRP4.32 TH7.9 | length 500
  Top Layer w7: TH7.9@2887.5,4253.54 v1(2887.5,4606.5)
  Bottom Layer w7: v1(2887.5,4606.5) ETH1_U_BOTTOM_HEADER_WRP4.32@2887.5,4753.54
OUTSIDE_R_W9_U_BOTTOM_HEADER_WRP1: ETH1_U_BOTTOM_HEADER_WRP1.31 TH3.10@2687.5,221.46 | length 1052.5
  Top Layer w7: TH3.10@2687,220.96 TH3.10@2687.5,221.46 v1(2687.5,334.5)
  Bottom Layer w7: v1(2687.5,334.5) 2738.5,385.5 2738.5,669.46 ; ETH1_U_BOTTOM_HEADER_WRP1.31@2687,720.96 2738.5,669.46 ; ETH1_U_BOTTOM_HEADER_WRP1.31@2687,720.96 2738.5,669.46 ; ETH1_U_BOTTOM_HEADER_WRP1.31@2687,720.96 2738.5,669.46 ; ETH1_U_BOTTOM_HEADER_WRP1.31@2687,720.96 2738.5,669.46 ; ETH1_U_BOTTOM_HEADER_WRP1.31@2687,720.96 2738.5,669.46 ; ETH1_U_BOTTOM_HEADER_WRP1.31@2687,720.96 2738.5,669.46 ; ETH1_U_BOTTOM_HEADER_WRP1.31@2687,720.96 2738.5,669.46 ; ETH1_U_BOTTOM_HEADER_WRP1.31@2687,720.96 2738.5,669.46
OUTSIDE_R_W9_U_BOTTOM_HEADER_WRP2: ETH1_U_BOTTOM_HEADER_WRP2.31 TH3.10@5253.54,2687.5 | length 503.5
  Top Layer w7: v1(5143.5,2687.5) TH3.10@5253.54,2687.5
  Bottom Layer w7: ETH1_U_BOTTOM_HEADER_WRP2.31@4753.54,2687.5 v1(5143.5,2687.5) v1@5146,2685
OUTSIDE_R_W9_U_BOTTOM_HEADER_WRP3: ETH1_U_BOTTOM_HEADER_WRP3.31 TH5.10 | length 500
  Top Layer w7: TH5.10@221.46,2787.5 v1(315,2787.5)
  Bottom Layer w7: v1(315,2787.5) ETH1_U_BOTTOM_HEADER_WRP3.31@721.46,2787.5
OUTSIDE_R_W9_U_BOTTOM_HEADER_WRP4: ETH1_U_BOTTOM_HEADER_WRP4.31 TH7.10 | length 500
  Top Layer w7: TH7.10@2787.5,4253.54 v1(2787.5,4606.5)
  Bottom Layer w7: v1(2787.5,4606.5) ETH1_U_BOTTOM_HEADER_WRP4.31@2787.5,4753.54
OUTSIDE_R_W10_U_BOTTOM_HEADER_WRP1: ETH1_U_BOTTOM_HEADER_WRP1.30 TH3.11@2787.5,221.46 | length 1052.5
  Top Layer w7: TH3.11@2787,220.96 TH3.11@2787.5,221.46 v1(2787.5,334.5)
  Bottom Layer w7: v1(2787.5,334.5) 2838.5,385.5 2838.5,669.46 ; ETH1_U_BOTTOM_HEADER_WRP1.30@2787,720.96 2838.5,669.46 ; ETH1_U_BOTTOM_HEADER_WRP1.30@2787,720.96 2838.5,669.46 ; ETH1_U_BOTTOM_HEADER_WRP1.30@2787,720.96 2838.5,669.46 ; ETH1_U_BOTTOM_HEADER_WRP1.30@2787,720.96 2838.5,669.46 ; ETH1_U_BOTTOM_HEADER_WRP1.30@2787,720.96 2838.5,669.46 ; ETH1_U_BOTTOM_HEADER_WRP1.30@2787,720.96 2838.5,669.46 ; ETH1_U_BOTTOM_HEADER_WRP1.30@2787,720.96 2838.5,669.46 ; ETH1_U_BOTTOM_HEADER_WRP1.30@2787,720.96 2838.5,669.46
OUTSIDE_R_W10_U_BOTTOM_HEADER_WRP2: ETH1_U_BOTTOM_HEADER_WRP2.30 TH3.11@5253.54,2787.5 | length 503.5
  Top Layer w7: v1(5143.5,2787.5) TH3.11@5253.54,2787.5
  Bottom Layer w7: ETH1_U_BOTTOM_HEADER_WRP2.30@4753.54,2787.5 v1(5143.5,2787.5) v1@5146,2785
OUTSIDE_R_W10_U_BOTTOM_HEADER_WRP3: ETH1_U_BOTTOM_HEADER_WRP3.30 TH5.11 | length 500
  Top Layer w7: TH5.11@221.46,2687.5 v1(315,2687.5)
  Bottom Layer w7: v1(315,2687.5) ETH1_U_BOTTOM_HEADER_WRP3.30@721.46,2687.5
OUTSIDE_R_W10_U_BOTTOM_HEADER_WRP4: ETH1_U_BOTTOM_HEADER_WRP4.30 TH7.11 | length 500
  Top Layer w7: TH7.11@2687.5,4253.54 v1(2687.5,4606.5)
  Bottom Layer w7: v1(2687.5,4606.5) ETH1_U_BOTTOM_HEADER_WRP4.30@2687.5,4753.54
OUTSIDE_R_W11_U_BOTTOM_HEADER_WRP1: ETH1_U_BOTTOM_HEADER_WRP1.29 TH3.12@2887.5,221.46 | length 1052.5
  Top Layer w7: TH3.12@2887,220.96 TH3.12@2887.5,221.46 v1(2887.5,334.5)
  Bottom Layer w7: v1(2887.5,334.5) 2938.5,385.5 2938.5,669.46 ; ETH1_U_BOTTOM_HEADER_WRP1.29@2887,720.96 2938.5,669.46 ; ETH1_U_BOTTOM_HEADER_WRP1.29@2887,720.96 2938.5,669.46 ; ETH1_U_BOTTOM_HEADER_WRP1.29@2887,720.96 2938.5,669.46 ; ETH1_U_BOTTOM_HEADER_WRP1.29@2887,720.96 2938.5,669.46 ; ETH1_U_BOTTOM_HEADER_WRP1.29@2887,720.96 2938.5,669.46 ; ETH1_U_BOTTOM_HEADER_WRP1.29@2887,720.96 2938.5,669.46 ; ETH1_U_BOTTOM_HEADER_WRP1.29@2887,720.96 2938.5,669.46 ; ETH1_U_BOTTOM_HEADER_WRP1.29@2887,720.96 2938.5,669.46
OUTSIDE_R_W11_U_BOTTOM_HEADER_WRP2: ETH1_U_BOTTOM_HEADER_WRP2.29 TH3.12@5253.54,2887.5 | length 503.5
  Top Layer w7: v1(5143.5,2887.5) TH3.12@5253.54,2887.5
  Bottom Layer w7: ETH1_U_BOTTOM_HEADER_WRP2.29@4753.54,2887.5 v1(5143.5,2887.5) v1@5146,2885
OUTSIDE_R_W11_U_BOTTOM_HEADER_WRP3: ETH1_U_BOTTOM_HEADER_WRP3.29 TH5.12 | length 500
  Top Layer w7: TH5.12@221.46,2587.5 v1(315,2587.5)
  Bottom Layer w7: v1(315,2587.5) ETH1_U_BOTTOM_HEADER_WRP3.29@721.46,2587.5
OUTSIDE_R_W11_U_BOTTOM_HEADER_WRP4: ETH1_U_BOTTOM_HEADER_WRP4.29 TH7.12 | length 500
  Top Layer w7: TH7.12@2587.5,4253.54 v1(2587.5,4606.5)
  Bottom Layer w7: v1(2587.5,4606.5) ETH1_U_BOTTOM_HEADER_WRP4.29@2587.5,4753.54
OUTSIDE_R_W12_U_BOTTOM_HEADER_WRP1: ETH1_U_BOTTOM_HEADER_WRP1.28 TH3.13@2987.5,221.46 | length 1052.5
  Top Layer w7: TH3.13@2987,220.96 TH3.13@2987.5,221.46 v1(2987.5,334.5)
  Bottom Layer w7: v1(2987.5,334.5) 3038.5,385.5 3038.5,669.46 ; ETH1_U_BOTTOM_HEADER_WRP1.28@2987,720.96 3038.5,669.46 ; ETH1_U_BOTTOM_HEADER_WRP1.28@2987,720.96 3038.5,669.46 ; ETH1_U_BOTTOM_HEADER_WRP1.28@2987,720.96 3038.5,669.46 ; ETH1_U_BOTTOM_HEADER_WRP1.28@2987,720.96 3038.5,669.46 ; ETH1_U_BOTTOM_HEADER_WRP1.28@2987,720.96 3038.5,669.46 ; ETH1_U_BOTTOM_HEADER_WRP1.28@2987,720.96 3038.5,669.46 ; ETH1_U_BOTTOM_HEADER_WRP1.28@2987,720.96 3038.5,669.46 ; ETH1_U_BOTTOM_HEADER_WRP1.28@2987,720.96 3038.5,669.46
OUTSIDE_R_W12_U_BOTTOM_HEADER_WRP2: ETH1_U_BOTTOM_HEADER_WRP2.28 TH3.13@5253.54,2987.5 | length 503.5
  Top Layer w7: v1(5143.5,2987.5) TH3.13@5253.54,2987.5
  Bottom Layer w7: ETH1_U_BOTTOM_HEADER_WRP2.28@4753.54,2987.5 v1(5143.5,2987.5) v1@5146,2985
OUTSIDE_R_W12_U_BOTTOM_HEADER_WRP3: ETH1_U_BOTTOM_HEADER_WRP3.28 TH5.13 | length 500
  Top Layer w7: TH5.13@221.46,2487.5 v1(315,2487.5)
  Bottom Layer w7: v1(315,2487.5) ETH1_U_BOTTOM_HEADER_WRP3.28@721.46,2487.5
OUTSIDE_R_W12_U_BOTTOM_HEADER_WRP4: ETH1_U_BOTTOM_HEADER_WRP4.28 TH7.13 | length 500
  Top Layer w7: TH7.13@2487.5,4253.54 v1(2487.5,4606.5)
  Bottom Layer w7: v1(2487.5,4606.5) ETH1_U_BOTTOM_HEADER_WRP4.28@2487.5,4753.54
OUTSIDE_R_W13_U_BOTTOM_HEADER_WRP1: ETH1_U_BOTTOM_HEADER_WRP1.27 TH3.14@3087.5,221.46 | length 1052.5
  Top Layer w7: TH3.14@3087,220.96 TH3.14@3087.5,221.46 v1(3087.5,334.5)
  Bottom Layer w7: v1(3087.5,334.5) 3138.5,385.5 3138.5,669.46 ; ETH1_U_BOTTOM_HEADER_WRP1.27@3087,720.96 3138.5,669.46 ; ETH1_U_BOTTOM_HEADER_WRP1.27@3087,720.96 3138.5,669.46 ; ETH1_U_BOTTOM_HEADER_WRP1.27@3087,720.96 3138.5,669.46 ; ETH1_U_BOTTOM_HEADER_WRP1.27@3087,720.96 3138.5,669.46 ; ETH1_U_BOTTOM_HEADER_WRP1.27@3087,720.96 3138.5,669.46 ; ETH1_U_BOTTOM_HEADER_WRP1.27@3087,720.96 3138.5,669.46 ; ETH1_U_BOTTOM_HEADER_WRP1.27@3087,720.96 3138.5,669.46 ; ETH1_U_BOTTOM_HEADER_WRP1.27@3087,720.96 3138.5,669.46
OUTSIDE_R_W13_U_BOTTOM_HEADER_WRP2: ETH1_U_BOTTOM_HEADER_WRP2.27 TH3.14@5253.54,3087.5 | length 503.5
  Top Layer w7: v1(5143.5,3087.5) TH3.14@5253.54,3087.5
  Bottom Layer w7: ETH1_U_BOTTOM_HEADER_WRP2.27@4753.54,3087.5 v1(5143.5,3087.5) v1@5146,3085
OUTSIDE_R_W13_U_BOTTOM_HEADER_WRP3: ETH1_U_BOTTOM_HEADER_WRP3.27 TH5.14 | length 500
  Top Layer w7: TH5.14@221.46,2387.5 v1(315,2387.5)
  Bottom Layer w7: v1(315,2387.5) ETH1_U_BOTTOM_HEADER_WRP3.27@721.46,2387.5
OUTSIDE_R_W13_U_BOTTOM_HEADER_WRP4: ETH1_U_BOTTOM_HEADER_WRP4.27 TH7.14 | length 500
  Top Layer w7: TH7.14@2387.5,4253.54 v1(2387.5,4606.5)
  Bottom Layer w7: v1(2387.5,4606.5) ETH1_U_BOTTOM_HEADER_WRP4.27@2387.5,4753.54
OUTSIDE_R_W14_U_BOTTOM_HEADER_WRP1: ETH1_U_BOTTOM_HEADER_WRP1.26 TH3.15@3187.5,221.46 | length 1052.5
  Top Layer w7: TH3.15@3187,220.96 TH3.15@3187.5,221.46 v1(3187.5,334.5)
  Bottom Layer w7: v1(3187.5,334.5) 3238.5,385.5 3238.5,669.46 ; ETH1_U_BOTTOM_HEADER_WRP1.26@3187,720.96 3238.5,669.46 ; ETH1_U_BOTTOM_HEADER_WRP1.26@3187,720.96 3238.5,669.46 ; ETH1_U_BOTTOM_HEADER_WRP1.26@3187,720.96 3238.5,669.46 ; ETH1_U_BOTTOM_HEADER_WRP1.26@3187,720.96 3238.5,669.46 ; ETH1_U_BOTTOM_HEADER_WRP1.26@3187,720.96 3238.5,669.46 ; ETH1_U_BOTTOM_HEADER_WRP1.26@3187,720.96 3238.5,669.46 ; ETH1_U_BOTTOM_HEADER_WRP1.26@3187,720.96 3238.5,669.46 ; ETH1_U_BOTTOM_HEADER_WRP1.26@3187,720.96 3238.5,669.46
OUTSIDE_R_W14_U_BOTTOM_HEADER_WRP2: ETH1_U_BOTTOM_HEADER_WRP2.26 TH3.15@5253.54,3187.5 | length 1052.7
  Top Layer w7: v1@5143.5,3187.5 TH3.15@5253.54,3187.5 ; v1(5148.04,3187.5) TH3.15@5258.09,3187.5
  Bottom Layer w7: ETH1_U_BOTTOM_HEADER_WRP2.26@4753.54,3187.5 v1@5143.5,3187.5 ; ETH1_U_BOTTOM_HEADER_WRP2.26@4758.09,3187.5 v1(5148.04,3187.5) v1@5150.54,3185 ; v1@5143.5,3187.5 v1@5146,3185 ; v1@5143.5,3187.5 v1@5145.77,3185.23 ; v1@5143.5,3187.5 v1@5146,3185 ; v1@5143.5,3187.5 v1@5146,3185 ; v1@5143.5,3187.5 v1@5146,3185 ; v1@5143.5,3187.5 v1@5145.77,3185.23 ; v1@5143.5,3187.5 v1@5146,3185 ; v1@5143.5,3187.5 v1@5145.77,3185.23 ; v1@5143.5,3187.5 v1@5146,3185 ; v1@5143.5,3187.5 v1@5145.77,3185.23 ; v1@5143.5,3187.5 v1@5146,3185 ; v1@5143.5,3187.5 v1@5145.77,3185.23 ; v1@5143.5,3187.5 v1@5145.77,3185.23 ; v1@5143.5,3187.5 v1@5146,3185 ; v1@5145.77,3185.23 v1@5146,3185 ; v1@5145.77,3185.23 v1@5146,3185 ; v1@5145.77,3185.23 v1@5146,3185 ; v1@5145.77,3185.23 v1@5146,3185 ; v1@5145.77,3185.23 v1@5146,3185
OUTSIDE_R_W14_U_BOTTOM_HEADER_WRP3: ETH1_U_BOTTOM_HEADER_WRP3.26 TH5.15 | length 500
  Top Layer w7: TH5.15@221.46,2287.5 v1(315,2287.5)
  Bottom Layer w7: v1(315,2287.5) ETH1_U_BOTTOM_HEADER_WRP3.26@721.46,2287.5
OUTSIDE_R_W14_U_BOTTOM_HEADER_WRP4: ETH1_U_BOTTOM_HEADER_WRP4.26 TH7.15 | length 500
  Top Layer w7: TH7.15@2287.5,4253.54 v1(2287.5,4606.5)
  Bottom Layer w7: v1(2287.5,4606.5) ETH1_U_BOTTOM_HEADER_WRP4.26@2287.5,4753.54
OUTSIDE_R_W15_U_BOTTOM_HEADER_WRP1: ETH1_U_BOTTOM_HEADER_WRP1.25 TH3.16@3287.5,221.46 | length 1052.5
  Top Layer w7: TH3.16@3287,220.96 TH3.16@3287.5,221.46 v1(3287.5,334.5)
  Bottom Layer w7: v1(3287.5,334.5) 3338.5,385.5 3338.5,669.46 ; ETH1_U_BOTTOM_HEADER_WRP1.25@3287,720.96 3338.5,669.46 ; ETH1_U_BOTTOM_HEADER_WRP1.25@3287,720.96 3338.5,669.46 ; ETH1_U_BOTTOM_HEADER_WRP1.25@3287,720.96 3338.5,669.46 ; ETH1_U_BOTTOM_HEADER_WRP1.25@3287,720.96 3338.5,669.46 ; ETH1_U_BOTTOM_HEADER_WRP1.25@3287,720.96 3338.5,669.46 ; ETH1_U_BOTTOM_HEADER_WRP1.25@3287,720.96 3338.5,669.46 ; ETH1_U_BOTTOM_HEADER_WRP1.25@3287,720.96 3338.5,669.46 ; ETH1_U_BOTTOM_HEADER_WRP1.25@3287,720.96 3338.5,669.46
OUTSIDE_R_W15_U_BOTTOM_HEADER_WRP2: ETH1_U_BOTTOM_HEADER_WRP2.25 TH3.16@5253.54,3287.5 | length 503.5
  Top Layer w7: v1(5148.04,3287.5) TH3.16@5258.09,3287.5
  Bottom Layer w7: ETH1_U_BOTTOM_HEADER_WRP2.25@4758.09,3287.5 v1(5148.04,3287.5) v1@5150.54,3285
OUTSIDE_R_W15_U_BOTTOM_HEADER_WRP3: ETH1_U_BOTTOM_HEADER_WRP3.25 TH5.16 | length 500
  Top Layer w7: TH5.16@221.46,2187.5 v1(315,2187.5)
  Bottom Layer w7: v1(315,2187.5) ETH1_U_BOTTOM_HEADER_WRP3.25@721.46,2187.5
OUTSIDE_R_W15_U_BOTTOM_HEADER_WRP4: ETH1_U_BOTTOM_HEADER_WRP4.25 TH7.16 | length 500.7
  Top Layer w7: v1@2187,4607 v1(2187.5,4606.5) TH7.16@2187.5,4253.54
  Bottom Layer w7: v1(2187.5,4606.5) ETH1_U_BOTTOM_HEADER_WRP4.25@2187.5,4753.54
SER0: OB15.DS OB16.Q | length 598.4
  Bottom Layer w7: OB16.Q@4864.57,4998.86 4864.57,5084.61 4893.95,5114 5236.95,5114 5263.38,5140.43 OB15.DS@5263.39,5231.14
SER1: OB14.DS OB15.Q | length 1264.5
  Bottom Layer w7: OB14.DS@4736.61,4083.86 4736.61,4133.39 4618,4252 4618,5070 4645,5097 4836,5097
SER2: OB13.DS OB14.Q | length 598.4
  Bottom Layer w7: OB14.Q@4864.57,4083.86 4864.57,4169.61 4893.95,4199 5236.95,4199 5263.39,4225.43 OB13.DS@5263.39,4316.14
SER3: OB12.DS OB13.Q | length 4817.9
  Mid-Layer 1 w7: v1(4693,4654) 1697,4654 ; v1@1615.69,4735.31 1697,4654 ; v1@1615.69,4735.31 1697,4654 ; v1@1615.69,4735.31 1697,4654 ; v1@1615.69,4735.31 1697,4654 ; v1@1615.69,4735.31 1697,4654 ; v1@1615.69,4735.31 1697,4654 ; v1@1615.69,4735.31 1697,4654
  Bottom Layer w7: OB12.DS@1401.14,4736.61 v1(1617,4736.61) ; v1@4694,4653 5117,4653 5176,4594 5176,4497 5135.43,4456.43 OB13.Q@5135.43,4316.14
SER4: OB11.DS OB12.Q
SER5: OB10.DS OB11.Q | length 947.5
  Mid-Layer 1 w7: v1(861,4711) 1169,5019 v1(1169,5060)
  Bottom Layer w7: OB10.DS@476.14,4736.61 835.39,4736.61 v1(861,4711) ; OB11.Q@1168.86,5135.43 1168.86,5060.14 v1(1169,5060)
SER6: OB9.DS OB10.Q | length 693.8
  Bottom Layer w7: OB9.DS@243.86,5263.39 246.6,5266.13 279.82,5266.13 325.7,5312 359,5312 377.5,5293.5 377.5,5157.19 301.92,5081.61 301.92,5038.79 OB10.Q@476.14,4864.57
SER7: OB8.DS OB9.Q | length 9861.6
  Bottom Layer w7: OB9.Q@243.86,5135.43 75.43,5135.43 23.5,5083.5 23.5,137.5 86,75 3776,75 3847,146 3847,679 3907,739 3907.61,738.39 OB8.DS@4083.86,738.39
SER8: OB7.DS OB8.Q | length 598.4
  Bottom Layer w7: OB8.Q@4083.86,610.43 4169.61,610.43 4199,581.05 4199,238.05 4225.43,211.62 OB7.DS@4316.14,211.61
SER9: OB6.DS OB7.Q | length 1025.4
  Bottom Layer w7: OB7.Q@4316.14,339.57 4615.57,339.57 4655,379 4655,682 4711,738 4998.47,738 OB6.DS@4998.86,738.39
SER10: OB5.DS OB6.Q | length 598.4
  Bottom Layer w7: OB6.Q@4998.86,610.43 5084.61,610.43 5114,581.05 5114,238.05 5140.43,211.62 OB5.DS@5231.14,211.61
SER11: OB4.DS OB5.Q | length 6806
  Mid-Layer 2 w7: v1(738.39,1574.61) 896.39,1574.61 966,1505 v1(966,41)
  Bottom Layer w7: OB4.DS@738.39,1381.14 v1(738.39,1574.61) ; v1(966,41) 5370,41 5428,99 5428,286 5413,301 5294.64,301 5258.82,336.83 5233.88,336.83 OB5.Q@5231.14,339.57
SER12: OB3.DS OB4.Q | length 598.4
  Bottom Layer w7: OB3.DS@211.61,1148.86 211.61,1234.61 241,1264 584,1264 610.43,1290.43 OB4.Q@610.43,1381.14
SER13: OB2.DS OB3.Q | length 1000.2
  Bottom Layer w7: OB3.Q@339.57,1148.86 339.57,888.43 409,819 686,819 738.39,766.61 OB2.DS@738.39,476.14
SER14: OB1.DS OB2.Q | length 598.4
  Bottom Layer w7: OB1.DS@211.61,243.86 211.61,329.61 241,359 584,359 610.43,385.43 OB2.Q@610.43,476.14
pads on no net: 0.1uF_1.2 0.1uF_1_U_VT_WRP2.2 0.1uF_1_U_VT_WRP3.2 0.1uF_1_U_VT_WRP6.2 0.1uF_2.2 S1.NC1 S1.NC2 S1.NC3 S2.NC1 S2.NC2 S2.NC3 S3.NC1 S3.NC2 S3.NC3 S4.NC1 S4.NC2 S4.NC3 S5.NC1 S5.NC2 S5.NC3 S6.NC1 S6.NC2 S6.NC3 S7.NC1 S7.NC2 S7.NC3 S8.NC1 S8.NC2 S8.NC3 ZIF.129 ZIF.130 ZIF.131 ZIF.132 ZIF.133 ZIF.134 ZIF.135 ZIF.136 ZIF.137 ZIF.138 ZIF.139 ZIF.140 ZIF.141 ZIF.142 ZIF.143 ZIF.144 ZIF.145 ZIF.146 ZIF.147 ZIF.148 ZIF.149 ZIF.150 ZIF.151 ZIF.152 ZIF.153 ZIF.154 ZIF.155 ZIF.156 ZIF.157 ZIF.158 ZIF.159 ZIF.160 ZIF.161 ZIF.162 ZIF.163 ZIF.164 ZIF.165 ZIF.166 ZIF.167 ZIF.168 ZIF.169

## Silkscreen, mask and mechanical layers (free items; w line width, h text height)
Mechanical 3:
  the board outline again, w10